# Altium PCB Main Board v5 China_Commercial.PcbDoc
Units mil, origin at the board's own origin, x right, y up, seen from the top; angles counter-clockwise.
Board outline 1600 x 1600 mil, 2 copper layers (Top Layer, Bottom Layer); 47 components, 70 nets, 224 pads, 60 vias.
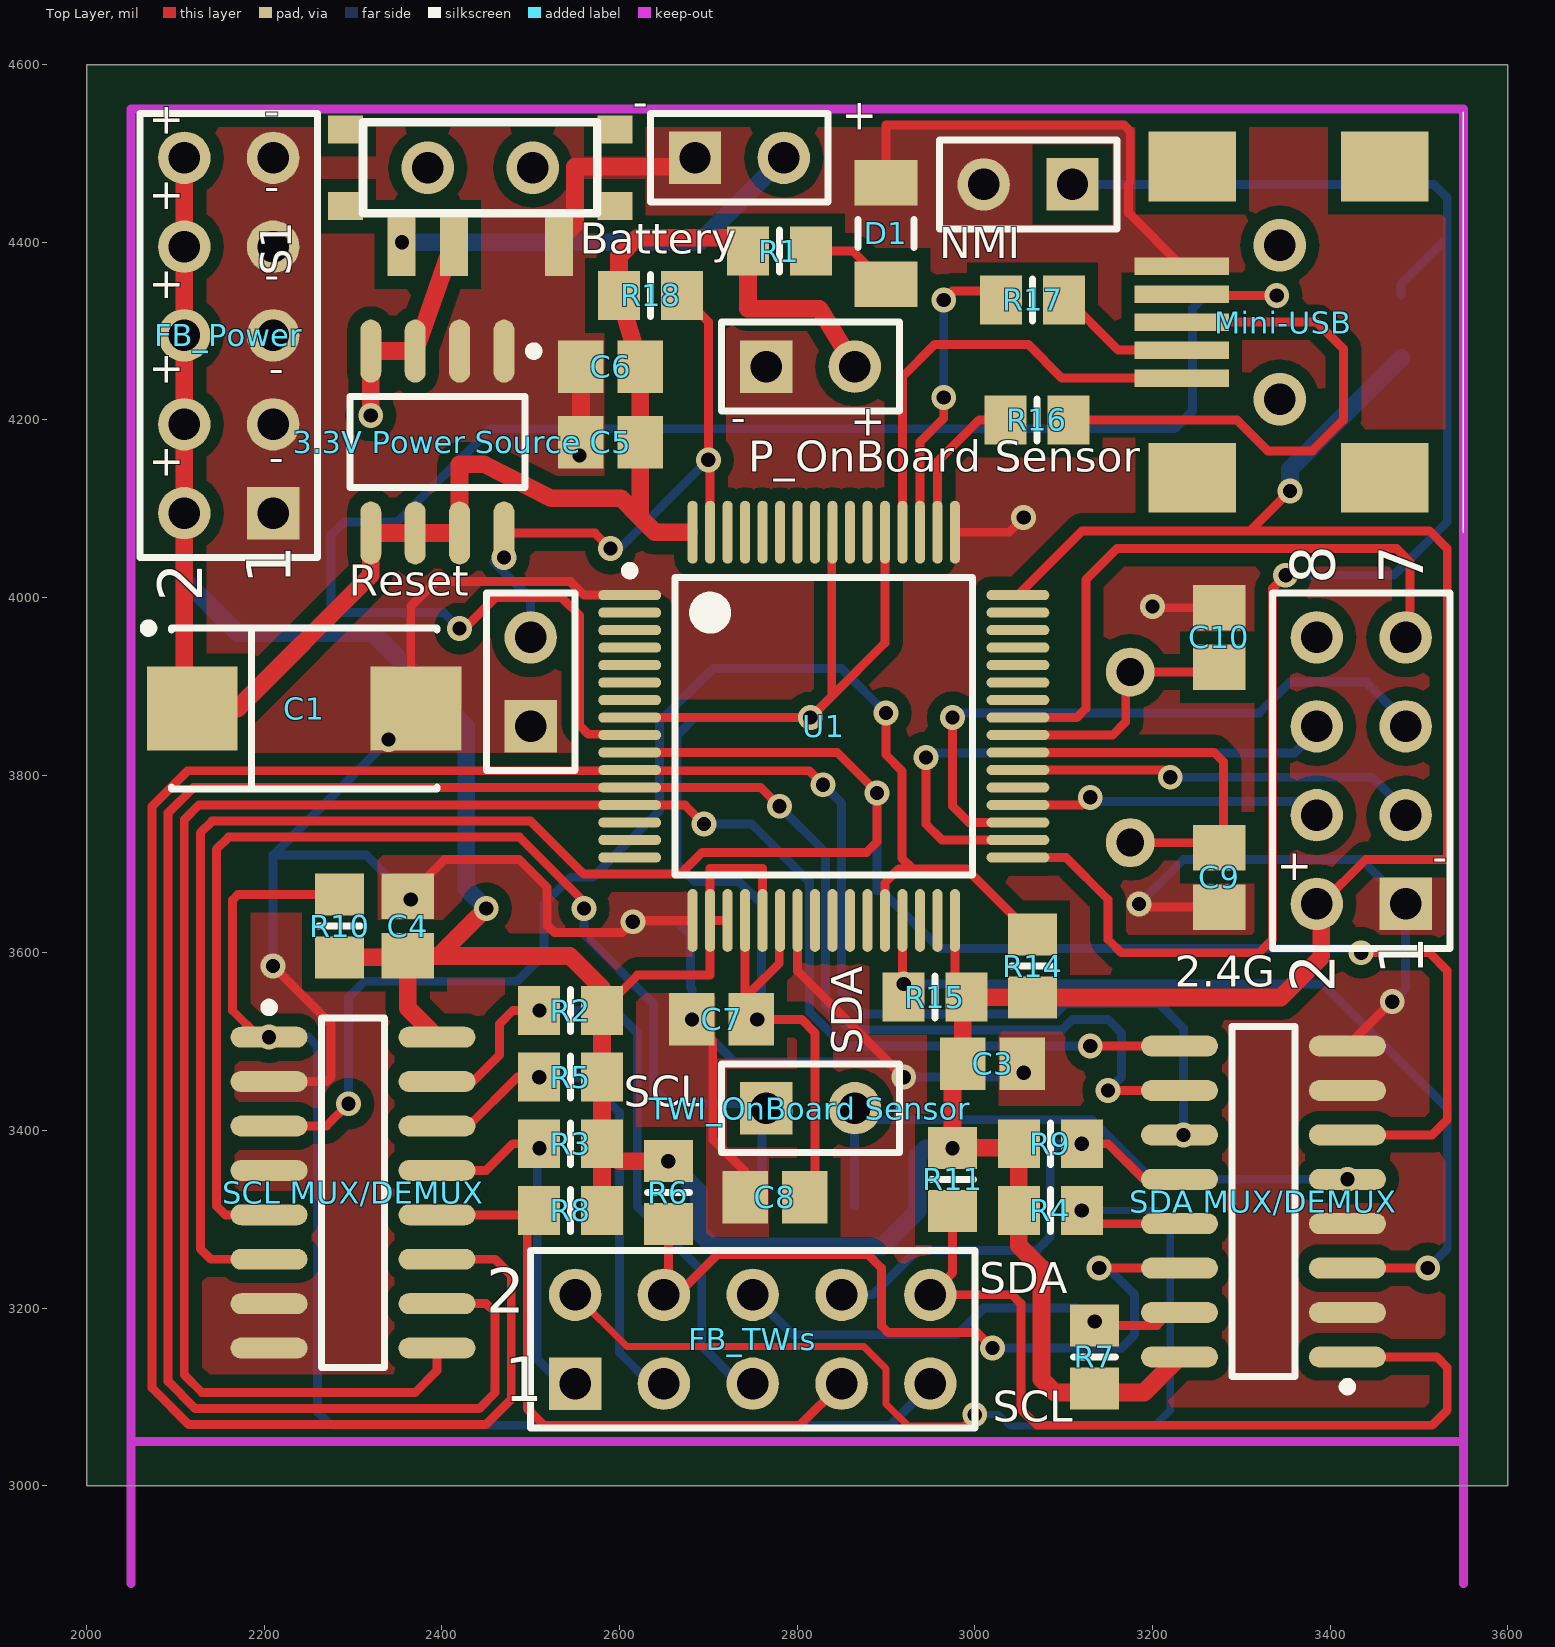
[diagram p0: Top Layer view]
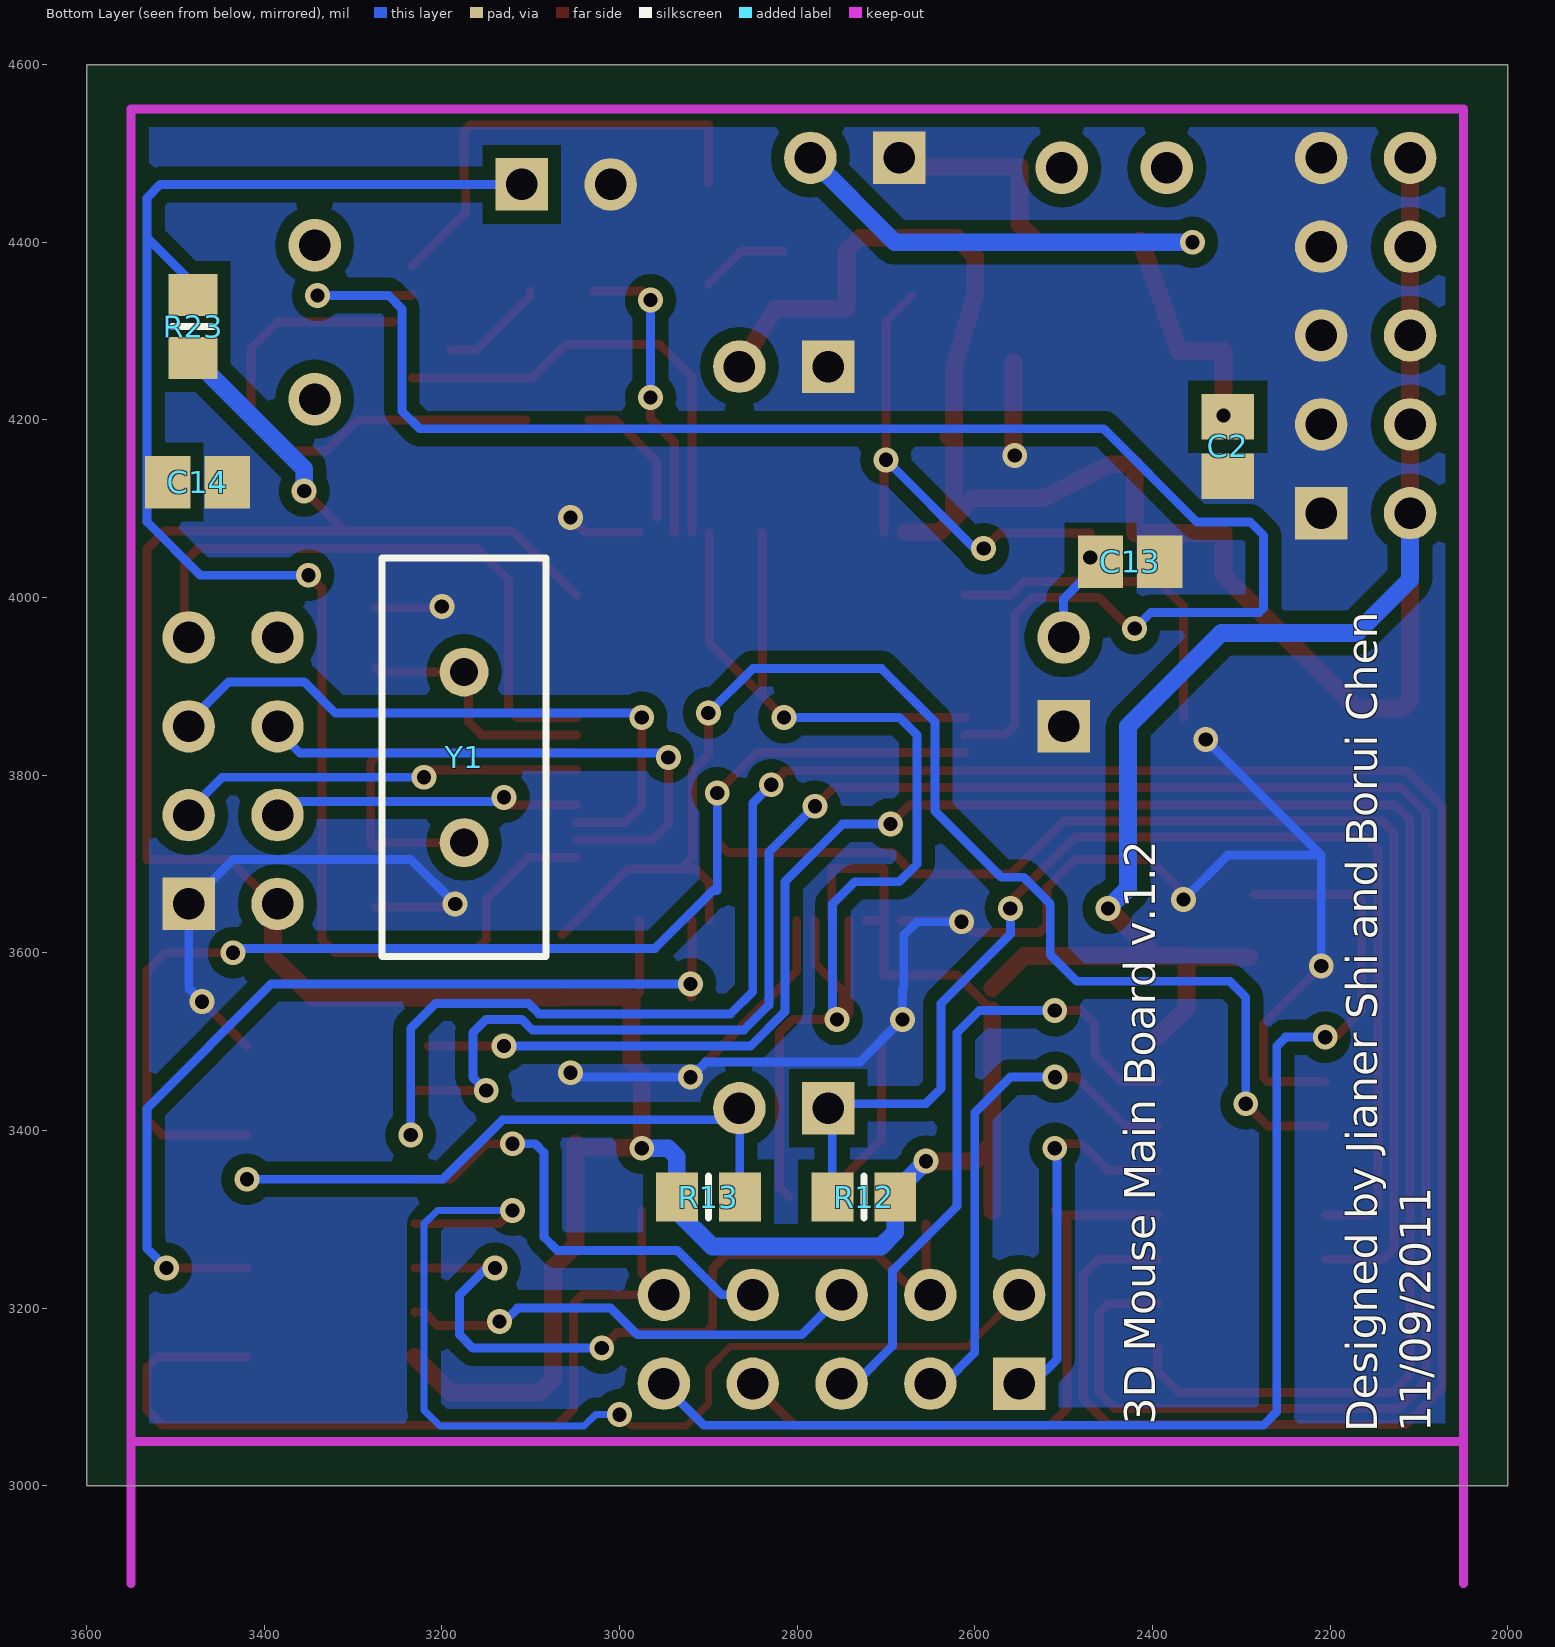
[diagram p1: Bottom Layer view, seen from below]

## Layer stack, top to bottom
Top Layer: signal copper 1.4
Dielectric: dielectric 12.6, FR-4, Dk 4.8
Bottom Layer: signal copper 1.4

## Board outline
2000,3000 3600,3000 3600,4600 2000,4600

## Design rules (kind name [scope] priority, off if disabled: settings)
Clearance "Polygon Clearance" [InPolygon] p1: gap=15
Clearance [All] p2: gap=8.1
HoleSize [All] p1: absolutevalues=TRUE maxlimit=100 minlimit=16 maxpercent=80.000 minpercent=20.000
MinimumAnnularRing [All] p1: minimumring=6
PolygonConnect [All] p1: connectstyle=Direct reliefconductorwidth=10 reliefentries=4 polygonreliefangle="90 Angle"
RoutingVias [All] p1: holewidth=16 width=28 viastyle="Through Hole" minholewidth=16 minwidth=27 maxholewidth=16 maxwidth=35
SilkscreenOverComponentPads [All] p1: minsilkscreentomaskgap=10
SolderMaskExpansion [All] p1: expansion=4
Width [All] p1: maxlimit=50 minlimit=8 preferedwidth=8
26 further rules are at their usual default settings.

## Classes and differential pairs
component class U_3: "3.3V Power Source" Battery C1 C2 D1 R1 S1
component class U_I2C_BUS_MUX: C3 C4 FB_Power FB_TWIs "P_OnBoard Sensor" R2 R3 R4 R5 R6 R7 R8 R9 R10 R11 R12 R13 "SCL MUX/DEMUX" "SDA MUX/DEMUX" "TWI_OnBoard Sensor"
component class "U_Main Board": 2.4G C5 C6 C7 C8 C9 C10 C13 C14 Mini-USB NMI R14 R15 R16 R17 R18 R23 Reset U1 Y1
net class BUS_SEL[2..0]: BUS_SEL0 BUS_SEL1 BUS_SEL2
net class PA[31..0]: PA0 PA1 PA2 PA3 PA4 PA8 PA9 PA10 PA11 PA12 PA13 PA14 PA15 PA16 PA17 PA18 PA19 PA20 PA21 PA22 PA23 PA24 PA25 PA26 PA27 PA28 PA29 PA30 PA31
net class PB[11..0]: PB0 PB1 PB2 PB3 PB4 PB5 PB6 PB7 PB8 PB9 PB10 PB11

## Components (designator, comment, footprint, x,y, rotation, side; value= is the part's Value field where it differs from the comment)
2.4G "Header 4X2" HDR2X4 3485,3655 r90 top
"3.3V Power Source" "TPS7333Q" SOIC127P600-8BN 2395,4175 r270 top
Battery "Header 2" HDR1X2 2685,4495 r0 top
C1 "Cap Pol1" TC7343-2917 2245,3875 r0 top
C2 "Cap Semi" CAPC2012N 2315,4170 r90 bottom
C3 "Cap Semi" CAPC2012N 3020,3475 r180 top
C4 "Cap Semi" CAPC2012N 2361.54,3630 r270 top
C5 "Cap Semi" CAPC2012N 2590,4175 r0 top
C6 "Cap Semi" CAPC2012N 2590,4260 r0 top
C7 "Cap Semi" CAPC2012N 2715,3525 r0 top
C8 "Cap Semi" CAPC2012N 2775,3325 r0 top
C9 "Cap Semi" CAPC2012N 3275,3685 r90 top
C10 "Cap Semi" CAPC2012N 3275,3955 r270 top
C13 "Cap Semi" CAPC2012N 2425,4040 r180 bottom
C14 "Cap Semi" CAPC2012N 3475,4130 r180 bottom
D1 "LED2" RESC3216N 2900,4410 r90 top
FB_Power "Header 5X2" HDR2X5 2210,4095 r90 top
FB_TWIs "Header 5X2" HDR2X5 2550,3115 r0 top
Mini-USB "Mini USB" "MINI USB" 3550,4310 r180 top
NMI "Header 2" HDR1X2 3110,4465 r180 top
"P_OnBoard Sensor" "P_OnBoard Sensor" HDR1X2 2765,4260 r0 top
R1 "Res3" RESC2012N 2780,4390 r0 top
R2 "Res3" RESC2012N 2545,3535 r180 top
R3 "Res3" RESC2012N 2545,3385 r180 top
R4 "Res3" RESC2012N 3085,3310 r0 top
R5 "Res3" RESC2012N 2545,3460 r180 top
R6 "Res3" RESC2012N 2655,3330 r270 top
R7 "Res3" RESC2012N 3135,3145 r90 top
R8 "Res3" RESC2012N 2545,3310 r180 top
R9 "Res3" RESC2012N 3085,3385 r0 top
R10 "Res3" RESC2012N 2285,3630 r90 top
R11 "Res3" RESC2012N 2975,3345 r270 top
R12 "Res3" RESC2012N 2725,3325 r0 bottom
R13 "Res3" RESC2012N 2900,3325 r180 bottom
R14 "Res3" RESC2012N 3065,3585 r270 top
R15 "Res3" RESC2012N 2955,3550 r0 top
R16 "Res3" RESC2012N 3070,4200 r180 top
R17 "Res3" RESC2012N 3065,4335 r180 top
R18 "Res3" RESC2012N 2635,4340 r0 top
R23 "Res3" RESC2012N 3480,4305 r90 bottom
Reset "Header 2" HDR1X2 2500,3855 r90 top
S1 "SW-SPDT" 563-1102-1-ND 2575,4535 r180 top
"SCL MUX/DEMUX" "74LV4051" SOIC127P600-16N 2300,3330 r0 top
"SDA MUX/DEMUX" "74LV4051" SOIC127P600-16N 3325,3320 r180 top
"TWI_OnBoard Sensor" "TWI_OnBoard Sensor" HDR1X2 2765,3425 r0 top
U1 "AT32UC3B0256-A2UT" "TQFP64_N - ECESHOP" 2830,3855 r0 top
Y1 "XTAL 12Mhz" "HC-49U - Through Hole" 3175,3820 r270 bottom

## Footprints (in the part's own frame and the unit in brackets; to place one, negate y for a bottom-side part, rotate by r counter-clockwise, add the part's x,y. Pads: shape width x height; smd on the part's side, far side on the other; paste and mask are expansions set on the pad)
563-1102-1-ND [mm]
  rect 0.8x1.8 smd: 1(5.6,3.5) 2(4.1,3.5) 3(1.1,3.5)
  rect 1x0.8 smd: NC(-0.5,2.4) NC(-0.5,0.2) NC(7.2,0.2) NC(7.2,2.4)
  silkscreen extent 0,0 6.7,2.6, body extent 3.56,-1.65 5.08,-0.13, height 1.1
CAPC2012N [mm] "Chip Capacitor, Body 2.0x1.3mm, IPC Medium Density"
  rect 1.3x1.5 smd: 1(-0.85,0) 2(0.85,0)
  body extent -1.1,-0.72 1.1,0.72, height 1.1
"HC-49U - Through Hole" [mm] "Quartz Crystal, Thru-Hole; 2 Leads; Body 11.35 x 4.65 x 13.46 mm (LxWxH max)"
  round 1.4 hole 0.8: 1(-2.44,0) 2(2.44,0)
  silkscreen extent -5.7,-2.35 5.7,2.35
HDR1X2 [mm] "Connector; Header; 2 Position"
  rect 1.5x1.5 hole 0.9: 1(0,0)
  round 1.5 hole 0.9: 2(2.54,0)
  silkscreen extent -1.27,-1.27 3.81,1.27
HDR2X4 [mm] "Connector; Header; 4x2 Position"
  rect 1.5x1.5 hole 0.9: 1(0,0)
  round 1.5 hole 0.9: 2(0,2.54) 3(2.54,0) 4(2.54,2.54) 5(5.08,0) 6(5.08,2.54) 7(7.62,0) 8(7.62,2.54)
  silkscreen extent -1.27,-1.27 8.89,3.81
HDR2X5 [mm] "Connector; Header; 5x2 Position"
  rect 1.5x1.5 hole 0.9: 1(0,0)
  round 1.5 hole 0.9: 2(0,2.54) 3(2.54,0) 4(2.54,2.54) 5(5.08,0) 6(5.08,2.54) 7(7.62,0) 8(7.62,2.54) 9(10.16,0) 10(10.16,2.54)
  silkscreen extent -1.27,-1.27 11.43,3.81
"MINI USB" [mm] "Digikey http://search.digikey.com/us/en/products/1734035-2/A31727CT-ND/773789"
  rect 2.7x0.5 smd: 1(8.05,1.6) 2(8.05,0.8) 3(8.05,0) 4(8.05,-0.8) 5(8.05,-1.6)
  rect 2.5x2 smd: NC(2.25,4.45) NC(2.25,-4.45) NC(7.75,-4.45) NC(7.75,4.45)
  silkscreen extent 0,-6 0,6
RESC2012N [mm] "Chip Resistor, Body 2.0x1.3mm, IPC Medium Density"
  rect 1.2x1.4 smd: 1(-0.9,0) 2(0.9,0)
  silkscreen extent 0,-0.6 0,0.6, body extent -1.07,-0.7 1.07,0.7, height 0.65
RESC3216N [mm] "Chip Resistor, Body 3.2x1.6mm, IPC Medium Density"
  rect 1.3x1.8 smd: 1(-1.45,0) 2(1.45,0)
  silkscreen extent -0.4,-0.8 0.4,0.8, body extent -1.68,-0.87 1.68,0.87, height 0.71
SOIC127P600-8BN [mm] "SOIC, 8-Leads, Body 4.9x3.9mm, Pitch 1.27mm, IPC Medium Density"
  oval 1.8x0.6 smd: 1(-2.6,1.905) 2(-2.6,0.635) 3(-2.6,-0.635) 4(-2.6,-1.905) 5(2.6,-1.905) 6(2.6,-0.635) 7(2.6,0.635) 8(2.6,1.905)
  silkscreen extent -2.72,-2.5 1.3,2.88, body extent -2,-2.5 2,2.5, height 2.59
SOIC127P600-16N [mm] "SOIC, 16-Leads, Body 9.9x3.9mm, Pitch 1.27mm, IPC Medium Density"
  oval 2.2x0.6 smd: 1(-2.4,4.445) 2(-2.4,3.175) 3(-2.4,1.905) 4(-2.4,0.635) 5(-2.4,-0.635) 6(-2.4,-1.905) 7(-2.4,-3.175) 8(-2.4,-4.445) 9(2.4,-4.445) 10(2.4,-3.175) 11(2.4,-1.905) 12(2.4,-0.635) 13(2.4,0.635) 14(2.4,1.905) 15(2.4,3.175) 16(2.4,4.445)
  silkscreen extent -2.52,-5 0.9,5.42, body extent -2,-5 2,5, height 1.75
TC7343-2917 [mm] "Capacitor, SM Tantalum; Body 7.3 x 4.3 mm (LxW typ)"
  rect 2.6x2.4 smd: 1(-3.2,0) 2(3.2,0)
  silkscreen extent -4.57,-2.3 3.8,2.42
"TQFP64_N - ECESHOP" [mm] "Thin QFP, 64-Leads, Body 10x10mm, Pitch 0.5mm, IPC Medium Density"
  oval 1.8x0.29 smd: 1(-5.55,3.75) 2(-5.55,3.25) 3(-5.55,2.75) 4(-5.55,2.25) 5(-5.55,1.75) 6(-5.55,1.25) 7(-5.55,0.75) 8(-5.55,0.25) 9(-5.55,-0.25) 10(-5.55,-0.75) 11(-5.55,-1.25) 12(-5.55,-1.75) 13(-5.55,-2.25) 14(-5.55,-2.75) 15(-5.55,-3.25) 16(-5.55,-3.75) 33(5.55,-3.75) 34(5.55,-3.25) 35(5.55,-2.75) 36(5.55,-2.25) 37(5.55,-1.75) 38(5.55,-1.25) 39(5.55,-0.75) 40(5.55,-0.25) 41(5.55,0.25) 42(5.55,0.75) 43(5.55,1.25) 44(5.55,1.75) 45(5.55,2.25) 46(5.55,2.75) 47(5.55,3.25) 48(5.55,3.75)
  oval 0.29x1.8 smd: 17(-3.75,-5.55) 18(-3.25,-5.55) 19(-2.75,-5.55) 20(-2.25,-5.55) 21(-1.75,-5.55) 22(-1.25,-5.55) 23(-0.75,-5.55) 24(-0.25,-5.55) 25(0.25,-5.55) 26(0.75,-5.55) 27(1.25,-5.55) 28(1.75,-5.55) 29(2.25,-5.55) 30(2.75,-5.55) 31(3.25,-5.55) 32(3.75,-5.55) 49(3.75,5.55) 50(3.25,5.55) 51(2.75,5.55) 52(2.25,5.55) 53(1.75,5.55) 54(1.25,5.55) 55(0.75,5.55) 56(0.25,5.55) 57(-0.25,5.55) 58(-0.75,5.55) 59(-1.25,5.55) 60(-1.75,5.55) 61(-2.25,5.55) 62(-2.75,5.55) 63(-3.25,5.55) 64(-3.75,5.55)
  silkscreen extent -5.67,-4.25 4.25,4.57, body extent -5,-5 5,5, height 1.2

## Part data
2.4G: "Header, 4-Pin, Dual row"
Battery NMI Reset: "Header, 2-Pin"
C1: "Polarized Capacitor (Radial)"
C2 C3 C4 C5 C6 C7 C8 C9 C10 C13 C14: "Capacitor (Semiconductor SIM Model)"
D1: "Typical RED, GREEN, YELLOW, AMBER GaAs LED"
FB_Power FB_TWIs: "Header, 5-Pin, Dual row"
"P_OnBoard Sensor" "TWI_OnBoard Sensor": library part "Header 2", "Header, 2-Pin"
R1 R2 R3 R4 R5 R6 R7 R8 R9 R10 R11 R12 R13 R14 R15 R16 R17 R18 R23: "Resistor"
S1: "SPDT Subminiature Toggle Switch, Right Angle Mounting, Vertical Actuation"
U1: "32-bit AVR UC3 B Series Microcontroller, 256KB Flash, 32KB SRAM, 44 GPIO pins, Industrial Grade, 64-Pin TQFP, Tray"
Y1: library part XTAL, "Crystal Oscillator"

## Via types
v1: diameter 28, hole 16, Top Layer to Bottom Layer, 56 vias
v2: diameter 59.06, hole 35.43, Top Layer to Bottom Layer, 4 vias

## Nets (pads, with @x,y where several pads share a name; then routed paths per layer and width w, separated by ;. In a path a pad name is that pad's centre, name@x,y a point inside that pad or via, vN(x,y) a via of type N, cw(c..) or ccw(c..) an arc to the next point about the centre after c; other vN are vias at no path point)
3.3VCC: 2.4G.2 "3.3V Power Source.5" "3.3V Power Source.6" "3.3V Power Source.7" "P_OnBoard Sensor.2" "SCL MUX/DEMUX.16" "SDA MUX/DEMUX.16" C1.1 C3.2 C4.2 C5.2 C6.2 FB_Power.2 FB_Power.4 FB_Power.6 FB_Power.8 FB_Power.10 R1.1 R2.1 R3.1 R4.1 R5.1 R6.1 R7.1 R8.1 R9.1 R10.1 R11.1 R12.1 R13.1 R14.2 R15.2 R18.1 R23.1 U1.18 U1.19 U1.21 U1.32 U1.48 U1.64 | length 6989.3
  Top Layer w10: R2.1 2620.43,3575 2702.05,3575 U1.18 ; U1.19 U1.18 ; U1.21 2761.1,3695 2702.05,3695 U1.18 ; U1.32 2977.64,3555 R15.2@2986.54,3546.1 ; U1.48 3120.87,4075 3310,4075 ; v1(3355,4120) 3310,4075 ; 2.4G.2@3390,3655 3440,3705 3531.9,3705 3531.9,4055 3511.9,4075 3310,4075
  Top Layer w20: FB_Power.10 FB_Power.8 FB_Power.6 FB_Power.4 FB_Power.2 2110,3884.02 C1.1 2170,3875 2320,4025 2320,4072.64 2370,4072.64 2420,4072.64 2420,4150 2447.36,4150 2523.37,4111.68 2601.82,4111.68 2623.46,4090.04 ; R10.1@2290.43,3595 2360,3595 C4.2 ; 2394.49,3505 2361.54,3537.95 C4.2 ; v1(2450,3650) 2396.54,3596.54 ; R8.1 R3.1 ; R2.1 R5.1 R3.1 ; R2.1@2580.43,3560 2543.9,3596.54 2396.54,3596.54 ; C5.2@2630,4181.54 C5.2 ; v1(2655,3365.43) 2600,3365.43 R3.1 ; U1.64@2678.24,4073.5 2640,4073.5 2623.46,4090.04 ; 2865,4260 2825,4325 2744.57,4325 R1.1 2729.57,4405 2620,4405 2599.57,4384.57 R18.1 C6.2 C5.2 ; R14.2@3059.57,3550 R15.2 2986.54,3546.1 C3.2 2975,3463.46 R11.1 3045,3380.43 R9.1 R4.1 3049.57,3270.43 3075,3245 3075,3120 3090,3105 3190.51,3105 3230.51,3145 ; R14.2 3344.57,3549.57 3390,3595 2.4G.2@3390,3655 ; C4.2 2396.54,3596.54 ; 2623.46,4090.04 C5.2
  Bottom Layer w20: FB_Power.2 2110,4020 2170,3960 2322.5,3960 2427.5,3855 2427.5,3672.5 v1(2450,3650) ; v1(2655,3365.43) 2689.57,3330.87 2689.57,3285.43 2705.66,3269.34 2895.69,3269.34 2935.43,3309.09 R13.1 2935.43,3370.43 2945,3380 v1(2975,3380) ; v1(3355,4120) 3355,4144.57 R23.1
BUS_SEL0: "SCL MUX/DEMUX.11" "SDA MUX/DEMUX.11" U1.11 | length 2876.4
  Top Layer w10: 2394.49,3255 2460,3255 2478.1,3236.9 2478.1,3097.5 2449.4,3068.8 2115.01,3068.8 2073.8,3110.01 2073.8,3764.99 2113.72,3804.91 U1.11@2610.62,3804.91 ; U1.11 U1.11@2610.62,3804.91 ; v1(2829.16,3789.16) 2813.41,3804.91 U1.11@2610.62,3804.91 ; v1@3230.51,3395 v1(3235,3395)
  Bottom Layer w10: v1(2829.16,3789.16) 2850,3768.33 2850,3556.2 2875,3531.2 3090.6,3531.2 3102.5,3543.1 3206.9,3543.1 3235,3515 v1(3235,3395)
BUS_SEL1: "SCL MUX/DEMUX.10" "SDA MUX/DEMUX.10" U1.12 | length 2649.5
  Top Layer w10: 2394.49,3205 2450,3205 2460,3195 2460,3105 2441.9,3086.9 2122.5,3086.9 2091.9,3117.5 2091.9,3757.5 2120.51,3786.1 U1.12 2758.9,3786.1 v1(2780,3765) ; v1(3150,3445) 3230.51,3445
  Bottom Layer w10: v1(2780,3765) 2831.9,3713.1 2831.9,3541.2 2860,3513.1 3098.1,3513.1 3110,3525 3150,3525 3165,3510 3165,3460 v1(3150,3445)
BUS_SEL2: "SCL MUX/DEMUX.9" "SDA MUX/DEMUX.9" U1.13 | length 2263.4
  Top Layer w10: 2394.49,3155 2394.49,3129.49 2370,3105 2130,3105 2110,3125 2110,3750 2126.42,3766.42 U1.13 2673.58,3766.42 v1(2695,3745) ; v1(3130,3495) 3215,3495
  Bottom Layer w10: v1(2695,3745) 2748.8,3745 2813.8,3680 2813.8,3533.7 2852.5,3495 v1(3130,3495)
GND: 2.4G.1 "3.3V Power Source.1" "3.3V Power Source.2" "P_OnBoard Sensor.1" "SCL MUX/DEMUX.2" "SCL MUX/DEMUX.4" "SCL MUX/DEMUX.7" "SCL MUX/DEMUX.8" "SDA MUX/DEMUX.2" "SDA MUX/DEMUX.4" "SDA MUX/DEMUX.7" "SDA MUX/DEMUX.8" Battery.1 C1.2 C2.1 C3.1 C4.1 C5.1 C6.1 C7.1 C8.1 C9.1 C10.1 C13.2 C14.2 D1.2 FB_Power.1 FB_Power.3 FB_Power.5 FB_Power.7 FB_Power.9 Mini-USB.5 NMI.2 Reset.1 S1.3 U1.1 U1.17 U1.23 U1.49 | length 4160.7
  Top Layer w10: 2205.51,3455 2270,3455 2275,3460 2275,3520 v1(2210,3585) ; v1(2365,3660) C4.1 2403.07,3705 2487.07,3705 2518.54,3673.54 2518.54,3631.1 2526.74,3622.9 2602.9,3622.9 v1(2615,3635) 2616.5,3636.5 U1.17 ; C1.2@2365,3865 2365,3990 2392.9,4017.9 2544.74,4017.9 2560,4002.64 U1.1 ; v1(2681.54,3525) 2705,3501.54 2705,3390 2741.54,3353.46 C8.1 ; U1.23 2800.47,3579.53 v1(2920,3460) ; D1.2 2900,4531.9 3168.1,4531.9 3175,4525 3175,4466.9 3173.1,4465 3173.1,4432.96 Mini-USB.5 ; U1.49 3038.5,4073.5 v1(3055,4090) ; v1(3185,3655) 3188.46,3651.54 C9.1 ; v1(3200,3990) 3201.54,3988.46 C10.1 ; 3419.49,3495 3469.49,3545 v1(3470,3545)
  Top Layer w20: S1.3@2531.69,4402.2 2549.79,4420.3 2549.79,4485 2675,4485 Battery.1 ; v1(2555,4160) 2556.54,4161.54 C5.1 C6.1 C6.1@2556.54,4265
  Bottom Layer w10: v1(2210,3585) 2210,3710 ; v1(2340,3840) 2210,3710 ; v1(2365,3660) 2315,3710 2210,3710 ; v1(2615,3635) 2665,3635 2680,3620 2680,3561.54 2681.54,3560 v1(2681.54,3525) 2729.64,3476.9 2903.1,3476.9 v1(2920,3460) 3050,3460 v1(3055,3465) ; v1(3185,3655) 3235,3705 3435,3705 2.4G.1 3485,3560 v1(3470,3545)
IRQ: 2.4G.8
JTAG_TCK: U1.2
"Net3.3V Power Source_3": "3.3V Power Source.3" "3.3V Power Source.4" C2.2 S1.2 | length 254.6
  Top Layer w20: v1(2320,4205) 2320,4277.36 2370,4277.36 S1.2@2413.58,4402.2
NetC7_2: C7.2 C8.2 U1.8 U1.20 U1.22 U1.53 U1.56 | length 1687.5
  Top Layer w10: U1.8 v1(2814.84,3864.84) 2838.97,3888.97 ; U1.20 2741.42,3532.05 C7.2 ; U1.22 2779.91,3635.62 2779.91,3587.96 2748.46,3556.52 C7.2 ; C8.2 2820,3336.54 2820,3510 2805,3525 v1(2755,3525) C7.2 ; U1.56 2838.97,4072.63 2838.97,3888.97 ; U1.53 2898.9,3948.9 2838.97,3888.97
  Bottom Layer w10: v1(2755,3525) 2760,3530 2760,3655 2735,3680 2685,3680 2665,3700 2665,3845 2685,3865 2714.69,3865 2714.84,3864.84 v1(2814.84,3864.84)
NetD1_1: D1.1 R1.2 | length 99.9
  Top Layer w10: R1.2 2862.91,4390 D1.1
NetR16_2: R16.2 U1.50 | length 159.1
  Top Layer w10: U1.50@2957.95,4090 2957.95,4152.95 3005,4200 R16.2
NetR17_2: R17.2 U1.51 | length 341.3
  Top Layer w10: U1.51 2938.27,4175 2965,4201.73 v1(2965,4225) ; v1(2965,4335) 2975,4345 R17.2@3029.57,4345
  Bottom Layer w10: v1(2965,4225) v1(2965,4335)
PA0: U1.3
PA1: U1.4
PA2: U1.5
PA3: Mini-USB.4 U1.9 | length 1930.8
  Top Layer w10: v1(2420,3965) 2425.2,3965 2460,3999.8 2535.2,3999.8 2555,3980 2555,3856.03 2565,3846.03 2610.62,3846.03 U1.9 ; Mini-USB.4 3234.57,4340 v1(3340,4340)
  Bottom Layer w10: v1(2420,3965) 2401.9,3983.1 2280,3983.1 2275,3988.1 2275,4070 2290,4085 2350,4085 2455,4190 3225,4190 3245,4210 3245,4325 3260,4340 v1(3340,4340)
PA4: "SCL MUX/DEMUX.6" "SDA MUX/DEMUX.6" U1.10 | length 2787
  Top Layer w10: 2205.51,3255 2140,3255 2128.1,3266.9 2128.1,3735 2141.42,3748.32 2500,3748.32 2559.76,3688.55 2668.55,3688.55 2693.1,3713.1 2878.1,3713.1 2890,3725 v1(2890,3780) 2890,3780.47 2845,3825.47 U1.10 ; 3419.49,3395 3515,3395 3531.9,3411.9 3531.9,3580 3511.9,3600 v1(3435,3600)
  Bottom Layer w10: v1(2890,3780) 2890,3670 2895,3670 2960,3605 3430,3605 v1(3435,3600)
PA8: U1.14
PA9: "SCL MUX/DEMUX.3" R14.1 U1.28 | length 1524.4
  Top Layer w10: 2205.51,3405 2270,3405 v1(2295,3430) ; U1.28 2898.9,3678.9 2914.45,3694.45 2930,3694.45 ; v1(2900,3870) 2900,3822.9 2917.9,3805 2917.9,3706.55 2930,3694.45 ; R14.1 3064.57,3620.43 2990.55,3694.45 2930,3694.45
  Bottom Layer w10: v1(2295,3430) 2295,3550 2312.9,3567.9 2485,3567.9 2515,3597.9 2515,3655 2545,3685 2570,3685 2645,3760 2645,3860 2705,3920 2850,3920 v1(2900,3870)
PA10: "SDA MUX/DEMUX.3" R15.1 U1.29 | length 1036.4
  Top Layer w10: U1.29 2918.58,3550.98 R15.1 ; 3419.49,3245 v1(3510,3245)
  Bottom Layer w10: v1(2920,3565) 3391.9,3565 3531.9,3425 3531.9,3266.9 v1(3510,3245)
PA11: U1.30
PA12: U1.31
PA13: C14.1 NMI.1 R23.2 U1.33 | length 1865.7
  Top Layer w10: U1.33 3102.64,3707.36 3150,3660 3150,3615 3165,3600 3320,3600 3335,3615 3335,4010 v1(3350,4025)
  Bottom Layer w10: NMI.1 3516.9,4465 3531.9,4450 3531.9,4405 ; v1(3350,4025) 3471.9,4025 3531.9,4085 3531.9,4405 ; R23.2 3480,4353.1 3531.9,4405
PA14: 2.4G.6 U1.34 | length 643.4
  Top Layer w10: v1(2945,3820) 2945,3745 2962.95,3727.05 U1.34
  Bottom Layer w10: v1(2945,3820) 2949.73,3824.73 3359.73,3824.73 3385,3850 2.4G.6
PA15: 2.4G.5 U1.35 | length 731.3
  Top Layer w10: v1(2975,3865) 2975,3765 2993.27,3746.73 U1.35
  Bottom Layer w10: v1(2975,3865) 2980,3870 3320,3870 3355,3905 3440,3905 3485,3860 2.4G.5
PA16: 2.4G.4 U1.36 | length 348.3
  Top Layer w10: U1.36 3121.42,3766.42 v1(3130,3775)
  Bottom Layer w10: v1(3130,3775) 3134.47,3770.53 3369.47,3770.53 2.4G.4
PA17: U1.37
PA18: C9.2 U1.39 Y1.2 | length 436.7
  Top Layer w10: U1.39 3159.53,3825.47 3269.53,3825.47 3280,3815 3280,3723.46 C9.2 3269.53,3723.94 Y1.2
PA19: C10.2 U1.40 Y1.1 | length 288
  Top Layer w10: U1.40 3155.16,3845.16 3170,3860 3170,3911.06 Y1.1 3269.53,3916.06 C10.2
PA20: U1.44
PA21: U1.45
PA22: U1.46
PA23: U1.47
PA24: U1.59
PA25: U1.60
PA26: U1.61
PA27: U1.62
PA28: 2.4G.7 U1.41 | length 717
  Top Layer w10: U1.41 3114.84,3864.84 3125,3875 3125,4020 3160,4055 3475,4055 3490,4040 2.4G.7@3490,3975 ; 2.4G.7 2.4G.7@3490,3975 ; 2.4G.7@3490,3955 2.4G.7@3490,3975
PA29: U1.42
PA30: U1.15
PA31: U1.16
PB0: U1.6
PB1: U1.7
PB2: U1.24
PB3: U1.25
PB4: U1.26
PB5: U1.27
PB6: 2.4G.3 U1.38 | length 460.5
  Top Layer w10: U1.38 3211.84,3805.79 v1(3220,3797.63)
  Bottom Layer w10: v1(3220,3797.63) 3447.37,3797.63 3485,3760 2.4G.3
PB7: U1.43
PB8: U1.54
PB9: U1.55
PB10: U1.57
PB11: U1.58
RESET_N: "3.3V Power Source.8" C13.1 R18.2 Reset.2 U1.63 | length 679.7
  Top Layer w10: v1@2470,4053.46 2470,4072.64 2572.36,4072.64 v1(2590,4055) ; R18.2 2700,4310.43 v1(2700,4155) 2702.05,4152.95 U1.63
  Bottom Layer w10: C13.1 2500,3998.46 Reset.2 ; v1(2590,4055) 2600,4055 v1(2700,4155)
  other v1: 2470,4045
TWI0_0: "SCL MUX/DEMUX.13" FB_TWIs.1 R3.2 | length 420
  Top Layer w10: 2394.49,3355 2450,3355 2480,3385 R3.2
  Bottom Layer w10: v1(2510,3380) 2507.37,3377.37 2507.37,3142.63 2535,3115 FB_TWIs.1
TWI0_1: "SDA MUX/DEMUX.13" FB_TWIs.2 R4.2 | length 1204.6
  Top Layer w8: FB_TWIs.2 2608.37,3156.63 2875,3156.63 2900,3131.63 2900,3092.1 2925,3067.1 2987.1,3067.1 v1(3000,3080)
  Top Layer w10: v1(3120.43,3310) 3135.43,3295 3230.51,3295
  Bottom Layer w8: v1(3000,3080) 3027.1,3080 3040,3067.1 3202.1,3067.1 3220,3085 3220,3295 3205,3310 v1(3120.43,3310)
TWI1_0: "SCL MUX/DEMUX.14" FB_TWIs.3 R5.2 | length 579.4
  Top Layer w10: 2394.49,3405 2430,3405 2485,3460 v1(2509.57,3460)
  Bottom Layer w10: v1(2509.57,3460) 2560,3460 2600,3420 2600,3150 2635,3115 FB_TWIs.3
TWI1_1: "SDA MUX/DEMUX.14" FB_TWIs.4 R6.2 | length 906
  Top Layer w10: R6.2 2655,3220 FB_TWIs.4 2665,3215 2710,3260 2880,3260 2895,3245 2895,3180 2902.63,3172.37 3002.63,3172.37 v1(3020,3155) ; v1(3140,3245) 3230.51,3245
  Bottom Layer w10: v1(3020,3155) 3165,3155 3180,3170 3180,3215 3150,3245 v1(3140,3245)
TWI2_0: "SCL MUX/DEMUX.15" FB_TWIs.5 R2.2 | length 746.7
  Top Layer w10: 2394.49,3455 2435,3455 2465,3485 2465,3520 2480,3535 R2.2
  Bottom Layer w10: v1(2510,3535) 2595,3535 2620,3510 2620,3314.86 2692.63,3242.23 2692.63,3157.37 2735,3115 FB_TWIs.5
TWI2_1: "SDA MUX/DEMUX.15" FB_TWIs.6 R7.2 | length 526.4
  Top Layer w10: R7.2 3205,3180.43 3220,3195.43 3230.08,3195.43 3230.51,3195
  Bottom Layer w10: FB_TWIs.6 2795,3170 2980,3170 3010,3200 3114.72,3200 3132.36,3182.36 v1(3135,3185)
TWI3_0: "SCL MUX/DEMUX.12" FB_TWIs.7 R8.2 | length 719.7
  Top Layer w10: 2394.49,3305 R8.2@2504.57,3305 ; R8.2 R8.2@2504.57,3305 ; FB_TWIs.7 2803.1,3068.1 2515,3068.1 2496.2,3086.9 2496.2,3296.63 R8.2@2504.57,3305
TWI3_1: "SDA MUX/DEMUX.12" FB_TWIs.8 R9.2 | length 523.1
  Top Layer w10: v1(3120.43,3385) 3150,3385 3190,3345 3230.51,3345
  Bottom Layer w10: FB_TWIs.8 2885,3215 2935,3265 3070,3265 3085,3280 3085,3375 3095,3385 v1(3120.43,3385)
TWI4_0: "SCL MUX/DEMUX.1" FB_TWIs.9 R10.2 | length 1488.5
  Top Layer w10: v1(2205.51,3505) 2194.3,3505 2164.3,3535 2164.3,3659.3 2170.43,3665.43 R10.2
  Bottom Layer w10: v1(2205.51,3505) 2250,3505 2260,3495 2260,3083.1 2275,3068.1 2905,3068.1 2950,3113.1 FB_TWIs.9
TWI4_1: "SDA MUX/DEMUX.1" FB_TWIs.10 R11.2 | length 989.7
  Top Layer w10: R11.2 2975,3240 FB_TWIs.10 3041.9,3215 3051.9,3205 3051.9,3086.2 3070,3068.1 3515,3068.1 3531.9,3085 3531.9,3133.1 3520,3145 3419.49,3145
TWI5_0: "SCL MUX/DEMUX.5" "TWI_OnBoard Sensor.1" R12.2 | length 1402.7
  Top Layer w10: 2205.51,3305 2156.2,3305 2146.2,3315 2146.2,3716.42 2160,3730.22 2487.45,3730.22 2560,3657.67 v1(2560,3650)
  Bottom Layer w10: v1(2560,3650) 2560,3620.87 2638.1,3542.77 2638.1,3446.9 2655,3430 2750.87,3430 2760.43,3420.43 R12.2 R12.2@2760.43,3315
  Bottom Layer w20: 2760.43,3420.43 2765,3425
TWI5_1: "SDA MUX/DEMUX.5" "TWI_OnBoard Sensor.2" R13.2 | length 705.6
  Top Layer w10: v1(3419.49,3345) 3419.49,3349.49 v1@3420,3350
  Bottom Layer w10: R13.2@2864.57,3315 2864.57,3424.57 ; 2865,3425 2877.9,3412.1 3131.66,3412.1 3198.76,3345 3415,3345 v1@3420,3350
  Bottom Layer w20: 2864.57,3424.57 2865,3425
USBDM: Mini-USB.2 R17.1 | length 120.3
  Top Layer w10: R17.1@3100.43,4345 3100.43,4339.57 3161.5,4278.5 Mini-USB.2@3190,4278.5
USBDP: Mini-USB.3 R16.1 | length 591
  Top Layer w10: R16.1 3295,4200 3330,4165 3380,4165 3415,4200 3415,4280 3385,4310 Mini-USB.3@3255,4310
VBUS: Mini-USB.1 U1.52 | length 520.4
  Top Layer w10: U1.52 2918.58,4248.58 2955,4285 3060,4285 3097.99,4247.01 Mini-USB.1
VIN: Battery.2 S1.1 | length 469.4
  Bottom Layer w20: v1(2355,4400) 2690,4400 Battery.2
pads on no net: Mini-USB.NC S1.NC
copper on no net:
  other v2: 3343.31,4223.39 3343.31,4396.61 2384.06,4483.82 2502.17,4483.82

## Polygon pours and split planes (outlines as drawn)
GND on Top Layer "Top Layer-GND" (solid, pour order 2): 2025,4575 3575,4575 3575,3025 2025,3025
GND on Bottom Layer "Bottom Layer-GND" (solid, pour order 6): 2025,4575 3575,4575 3575,3025 2025,3025

## Keep-outs
Keep-Out Layer:
  lines w10: 2050,2890 2050,4550 3550,4550 3550,2890 ; 2050,3050 3550,3050

## Silkscreen, mask and mechanical layers (free items; w line width, h text height)
Top Overlay:
  text "-" at 2615,4530 h60
  text "-" at 2200,4520 h60
  text "+" at 2850,4515 h60
  text "+" at 2070,4510 h60
  text "-" at 2200,4435 h60
  text "+" at 2070,4425 h60
  text "-" at 2200,4335 h60
  text "+" at 2070,4325 h60
  text "+" at 2070,4230 h60
  text "-" at 2205,4230 h60
  text "-" at 2725,4175 h60
  text "+" at 2860,4170 h60
  text "-" at 2205,4130 h60
  text "+" at 2070,4125 h60
  text "-" at 3515,3680 h60
  text "+" at 3340,3670 h60
  text "SDA" at 2885,3485 h60 r90
  text "SCL" at 2605,3415 h60
  text "SDA" at 3005,3205 h60
  text "SCL" at 3020,3060 h60
Bottom Overlay:
  text "3D Mouse Main Board v.1.2" at 2385,3068.8 h60 r270
  text "11/09/2011" at 2075,3060 h60 r270
  text "Designed by Jianer Shi and Borui Chen" at 2135,3060 h60 r270
Mechanical 4:
  lines w10: 2050,3050 3550,3050 3550,4550 2050,4550 2050,3050

## Dimensions
2050,3050 to 3550,3050 on Mechanical 1
2050,3050 to 2050,4550 on Mechanical 1

## Text inside footprints (layer, text, board x,y; h text height)
2.4G: Top Overlay "8" at 3405,4015 h50 r90; Top Overlay "7" at 3505,4015 h50 r90; Top Overlay "1" at 3505,3575 h50 r90; Top Overlay "2" at 3405,3555 h50 r90
FB_Power: Top Overlay "2" at 2130,3995 h50 r90; Top Overlay "1" at 2230,4015 h50 r90
FB_TWIs: Top Overlay "2" at 2450,3195 h50; Top Overlay "1" at 2470,3095 h50